# Altium PCB SV601275A.PcbDoc (part 1 of 3)
Units mil, origin at the board's own origin, x right, y up, seen from the top; angles counter-clockwise.
Board outline 1980 x 1700 mil, 6 copper layers (Top Layer, MidLayer1, MidLayer2, Mid-Layer 3, Mid-Layer 4, Bottom Layer), stack 61.3 mil thick; 82 components, 37 nets, 191 pads, 177 vias.
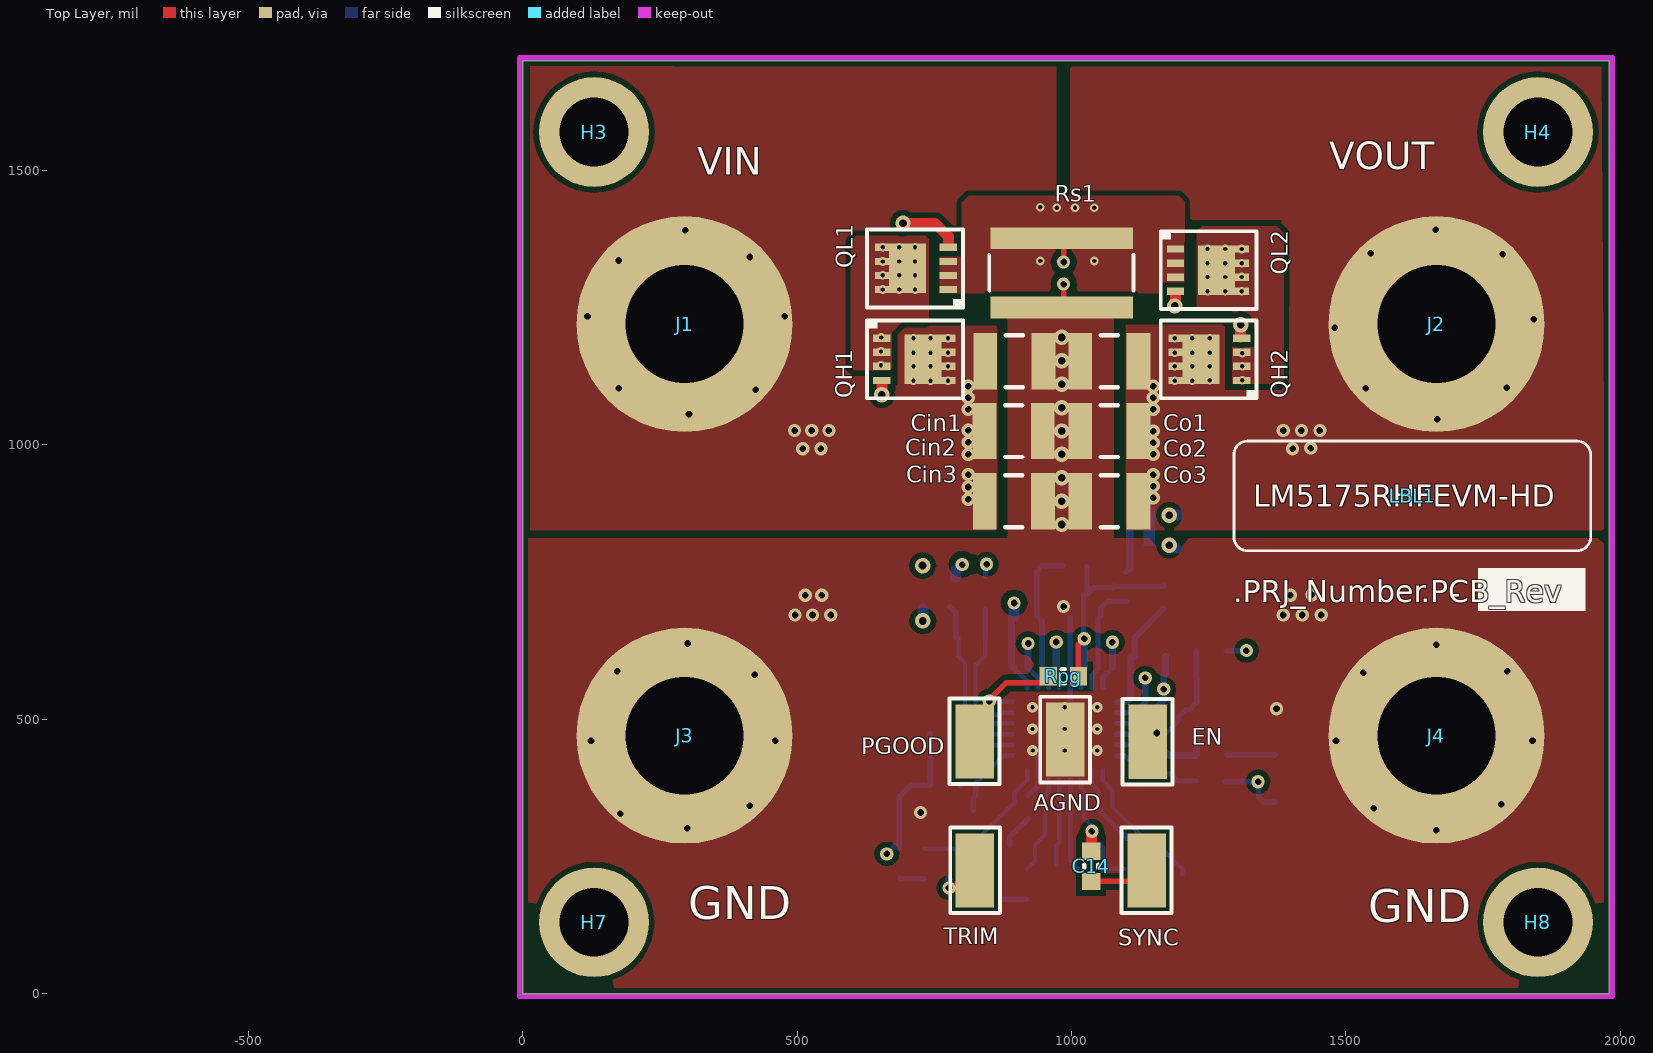
[diagram p0: Top Layer view]
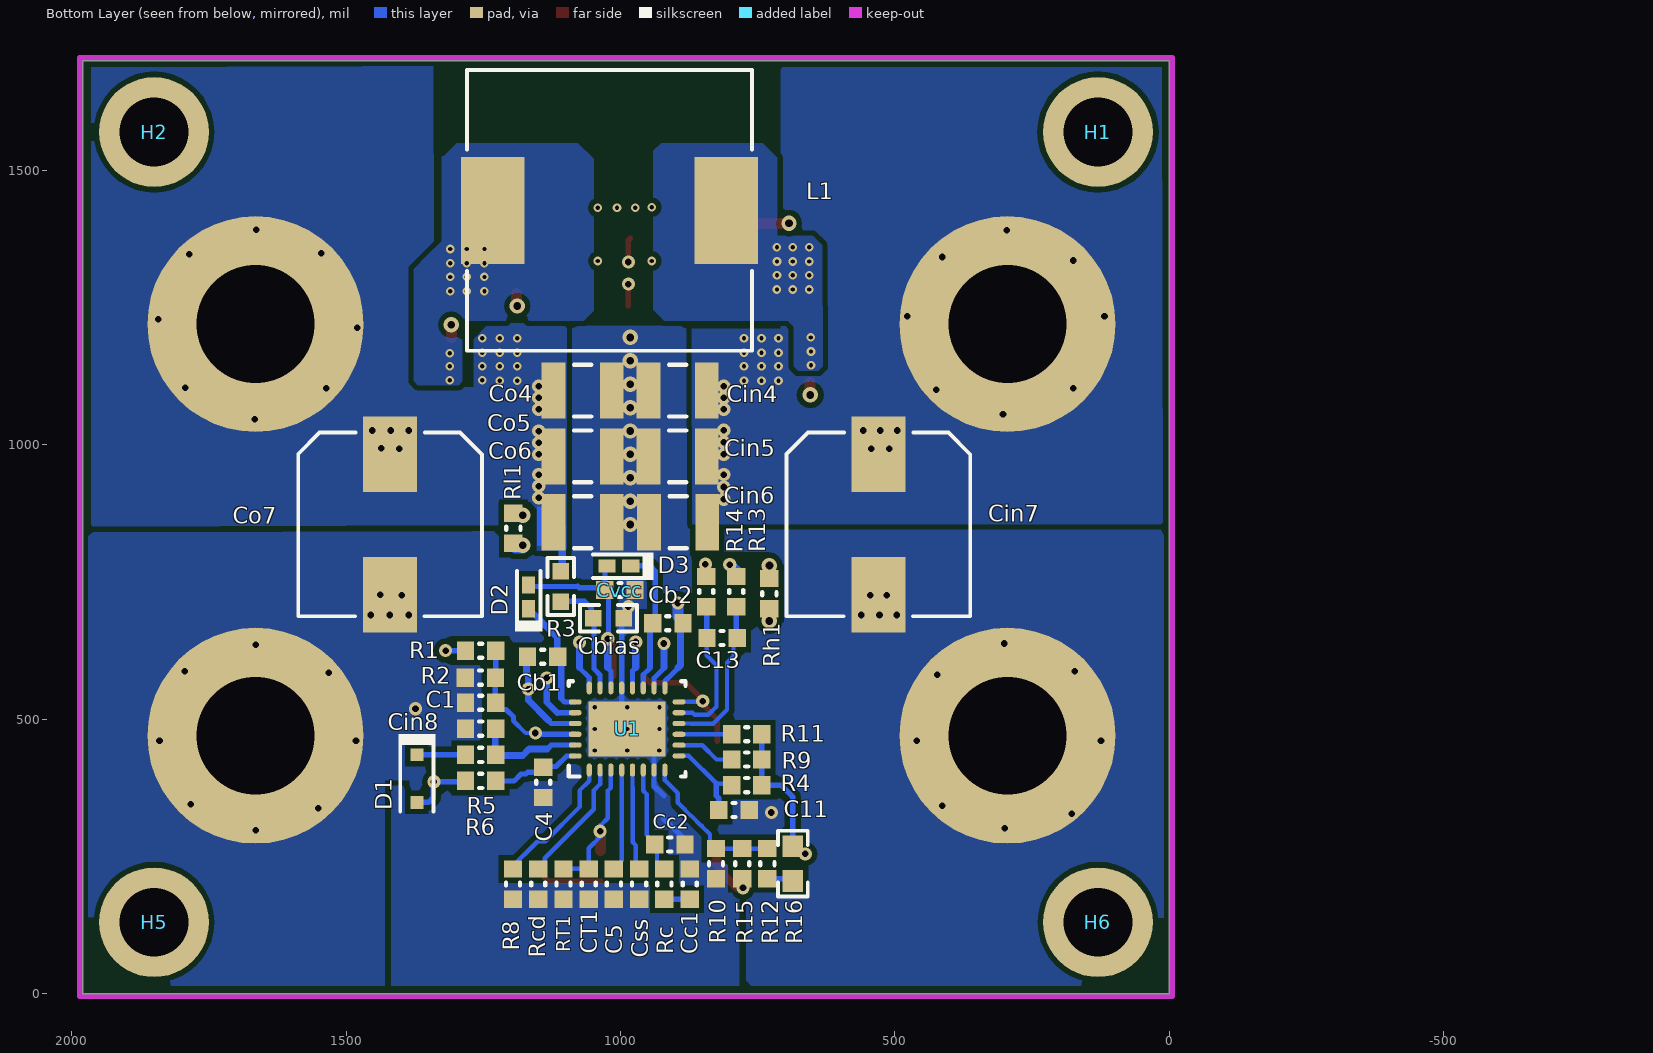
[diagram p1: Bottom Layer view, seen from below]
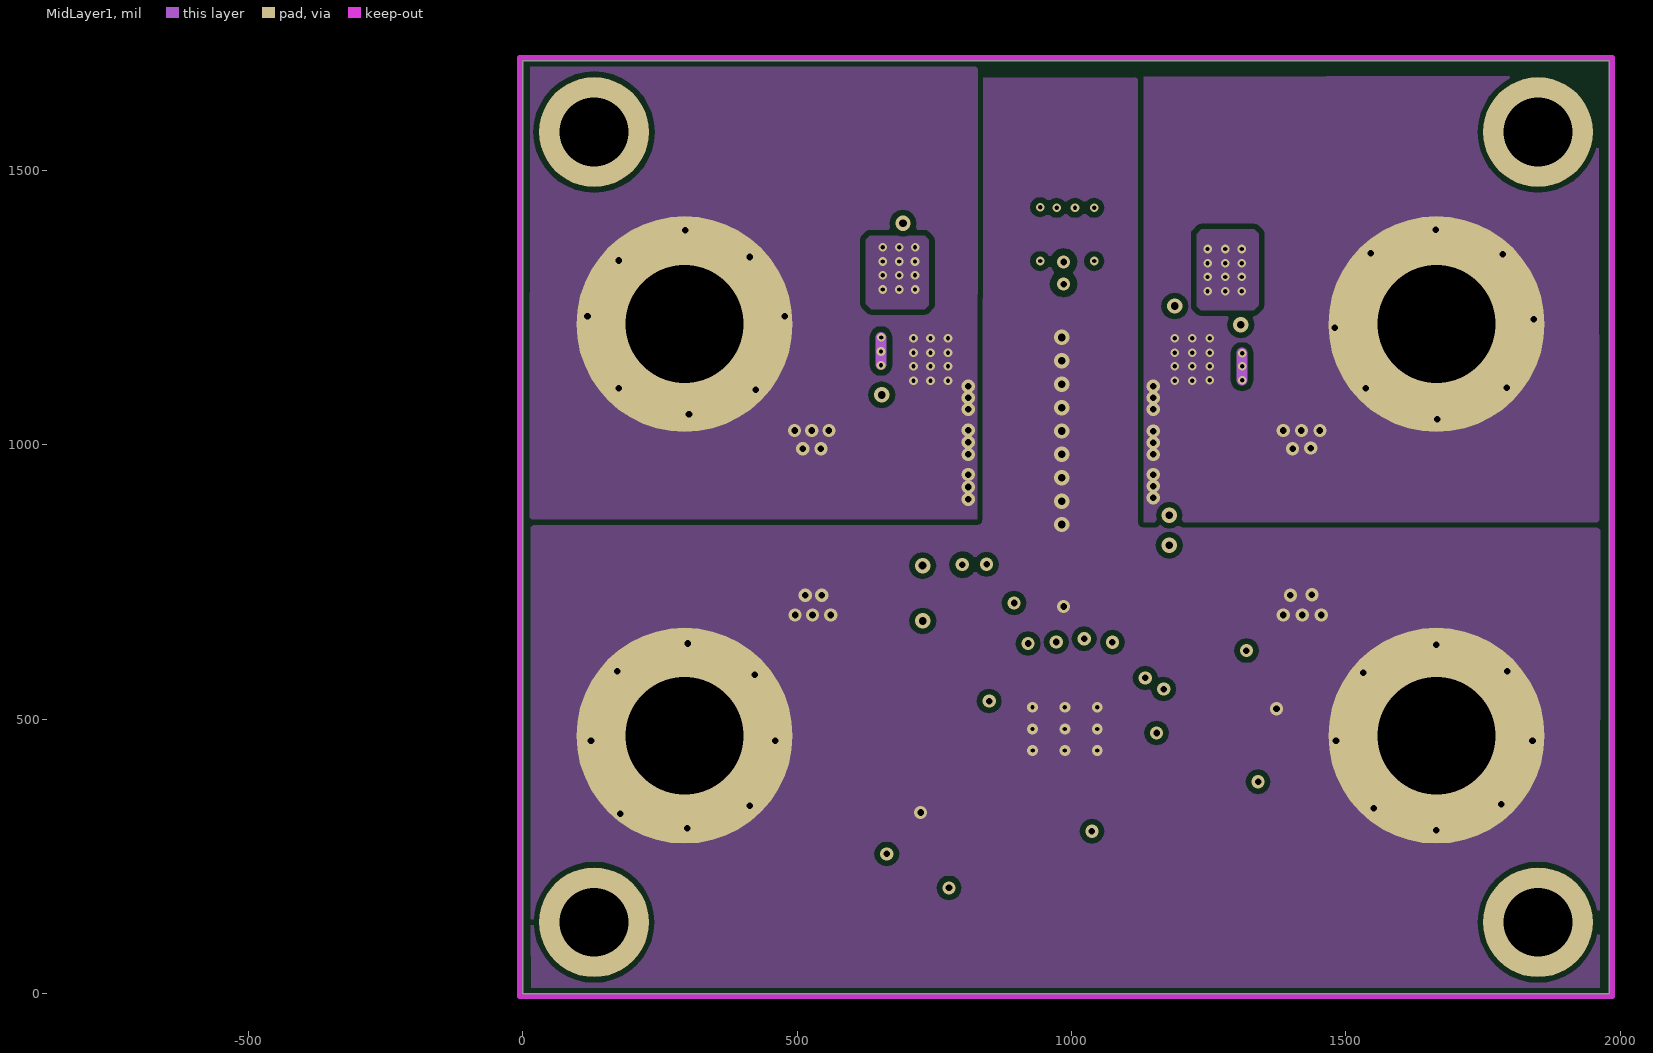
[diagram p2: MidLayer1]
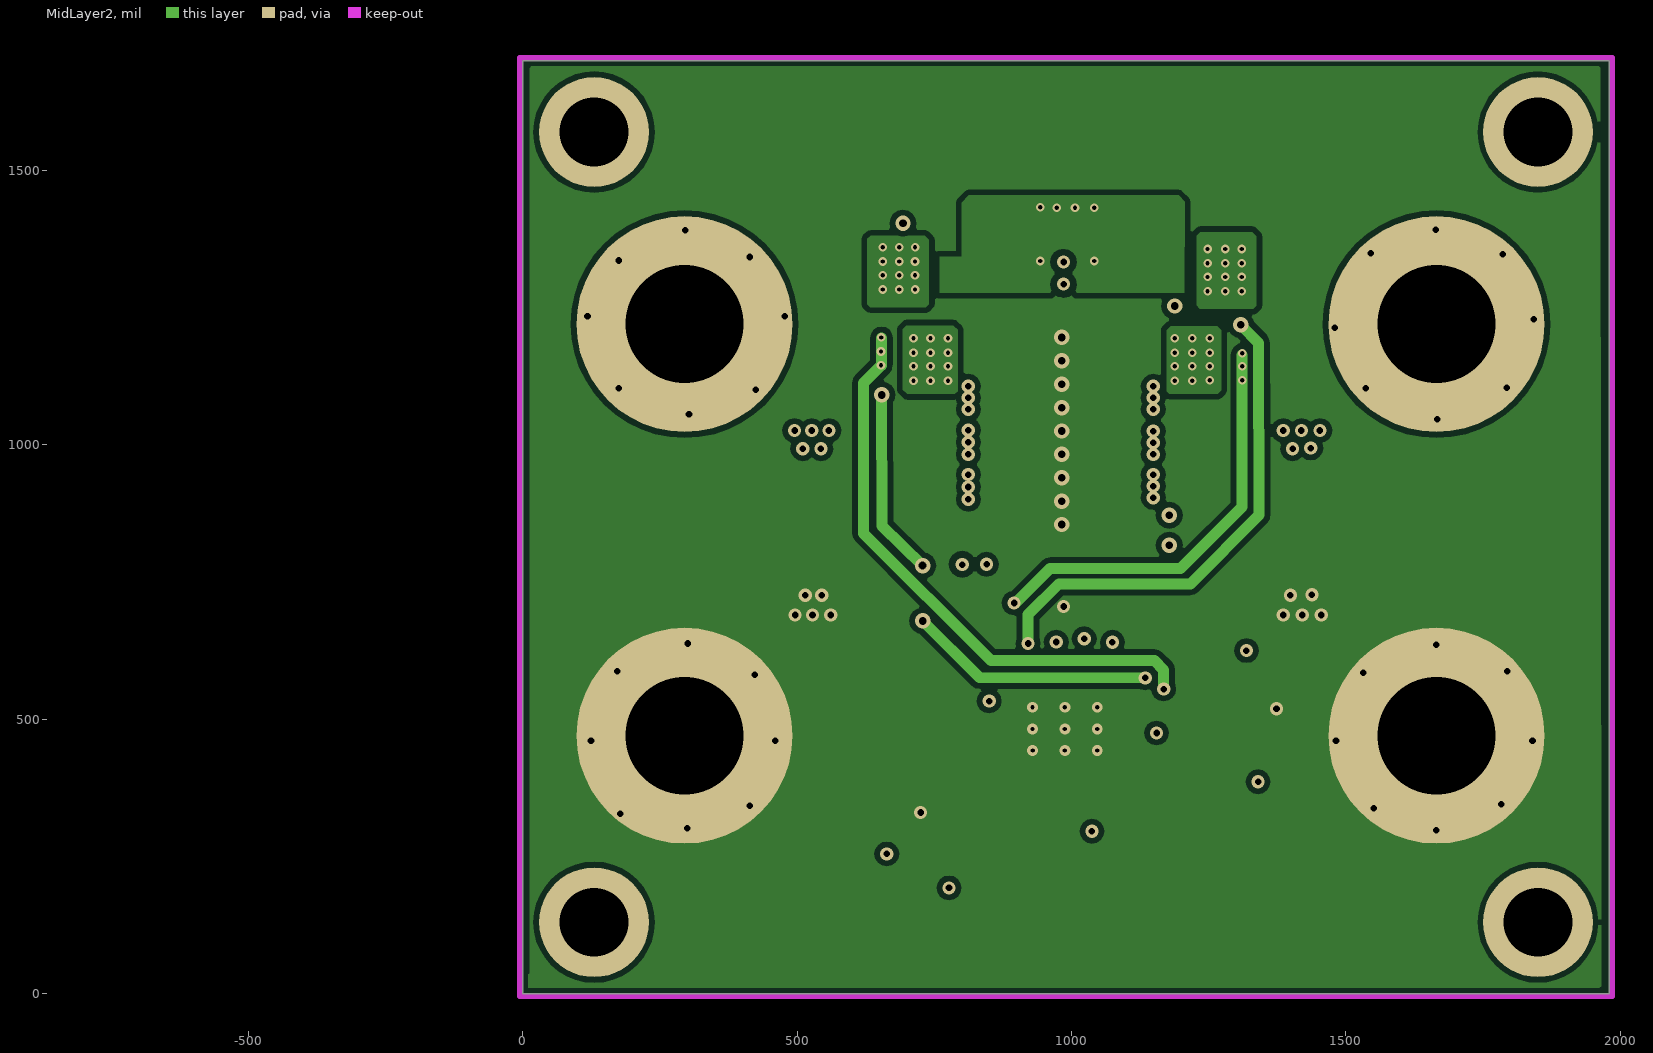
[diagram p3: MidLayer2]
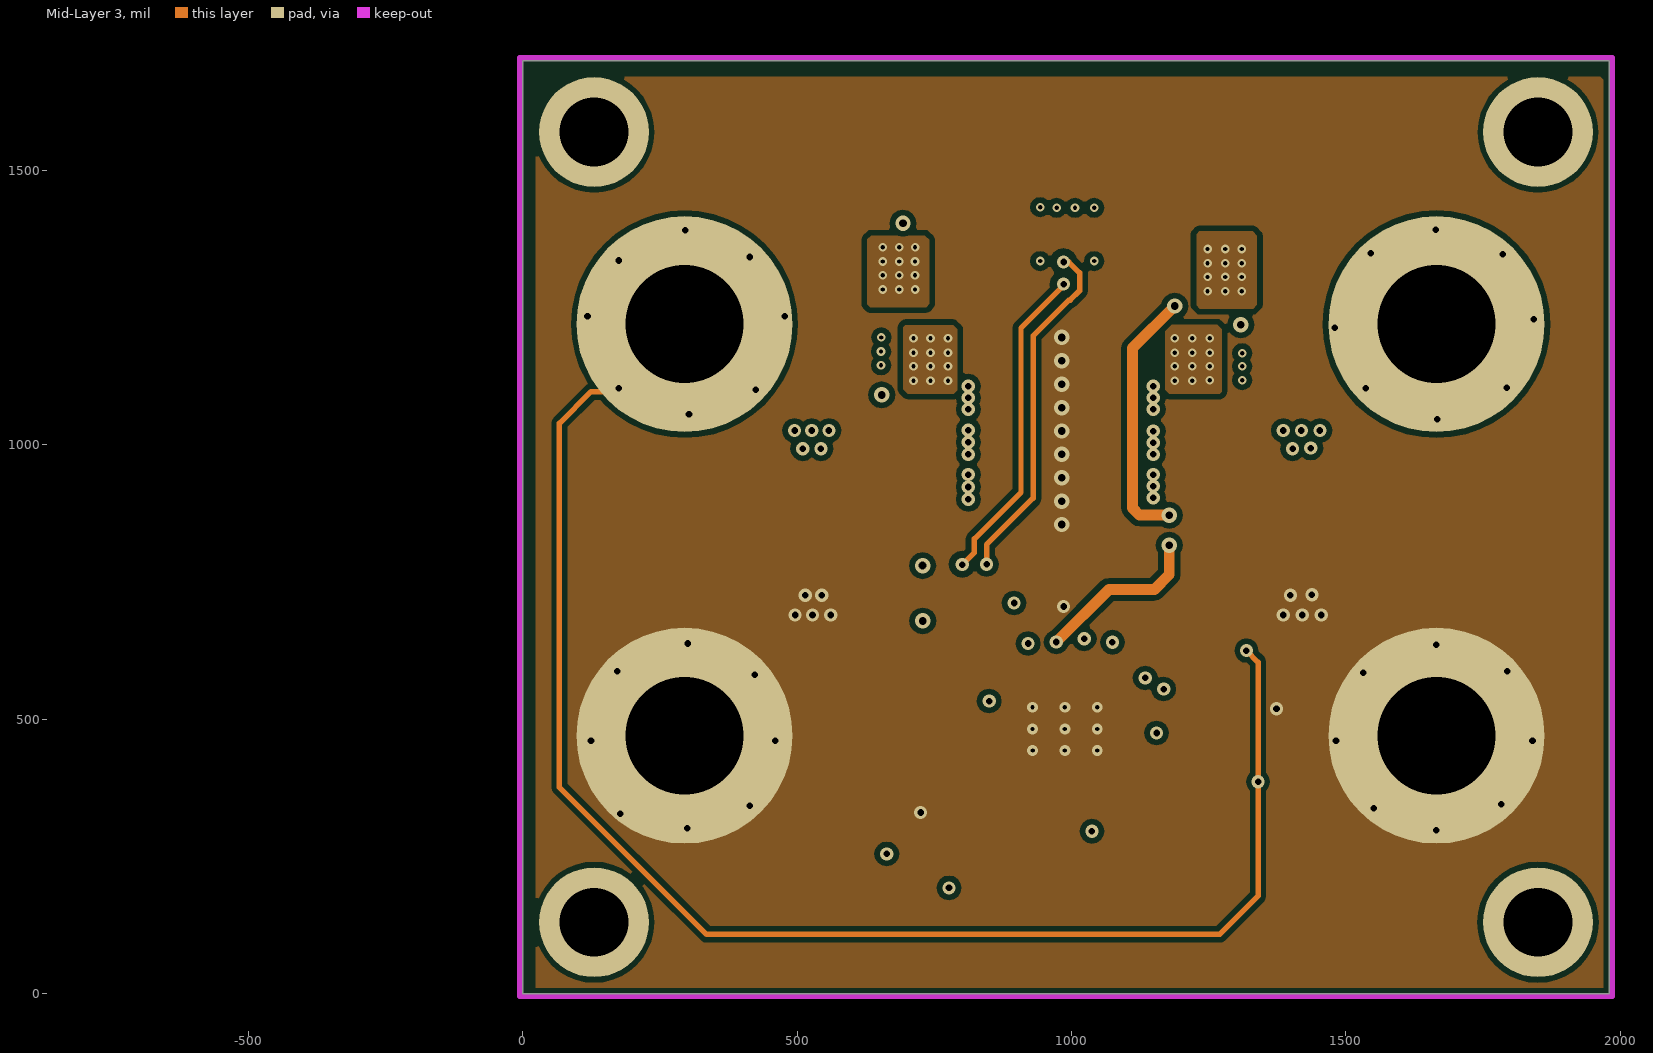
[diagram p4: Mid-Layer 3]
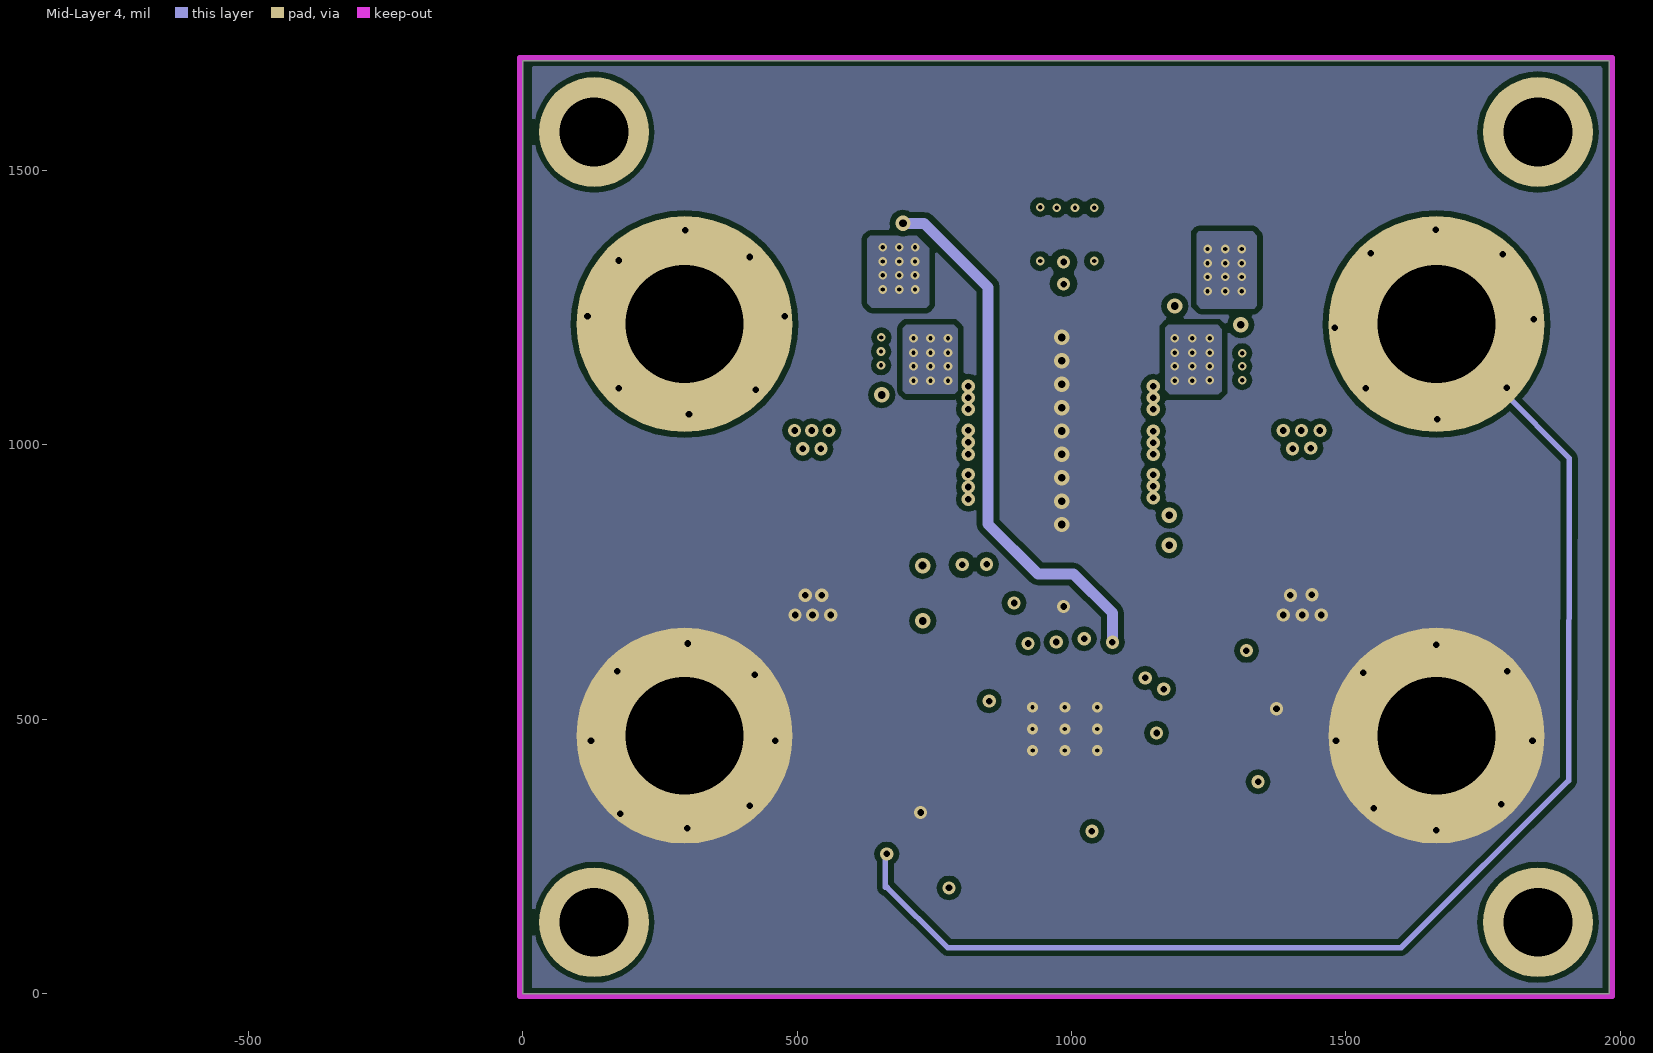
[diagram p5: Mid-Layer 4]

## Layer stack, top to bottom
Top Solder: solder mask 0.4, Solder Resist, Dk 3.5
Top Layer: signal copper 2.8
Dielectric1: core 8.9, FR-4, Dk 4.8
MidLayer1: signal copper 2.8
Dielectric2: prepreg 8.9, FR-4, Dk 4.8
MidLayer2: signal copper 2.8
Dielectric3: core 8.9, FR-4, Dk 4.8
Mid-Layer 3: signal copper 2.8
Dielectric4: prepreg 8.9, FR-4, Dk 4.8
Mid-Layer 4: signal copper 2.8
Dielectric5: core 8.9, FR-4, Dk 4.8
Bottom Layer: signal copper 2.8
Bottom Solder: solder mask 0.4, Solder Resist, Dk 3.5

## Board outline
0,0 0,1700 1980,1700 1980,0

## Design rules (kind name [scope] priority, off if disabled: settings)
AcuteAngle [All] p1: minimum=4.50000000000000E+0001 checktracksonly=FALSE
AssemblyTestPointUsage [All] p1: valid=2
Clearance Clearance_2 [InNet('NetQl1_1')] p1: gap=10 ignorepadtopadclearanceinfootprint=FALSE except(0: Arc-Hole Track-Hole SMDPad-Hole THPad-Hole Via-Hole Fill-Hole Poly-Hole Region-Hole Text-Hole)
Clearance Clearance_1 [InPolygon] p2: gap=10 ignorepadtopadclearanceinfootprint=FALSE except(0: Arc-Hole Track-Hole SMDPad-Hole THPad-Hole Via-Hole Fill-Hole Poly-Hole Region-Hole Text-Hole)
Clearance "Clearance_Polygon Board Edge" [InPolygon and OnCopper vs IsKeepout] p3: gap=25 ignorepadtopadclearanceinfootprint=FALSE except(0: Arc-Hole Track-Hole SMDPad-Hole THPad-Hole Via-Hole Fill-Hole Poly-Hole Region-Hole Text-Hole)
Clearance [All] p4: gap=8 ignorepadtopadclearanceinfootprint=FALSE except(0: Arc-Hole Track-Hole SMDPad-Hole THPad-Hole Via-Hole Fill-Hole Poly-Hole Region-Hole Text-Hole)
ComponentClearance ComponentClearance_1 [HasFootprint('SOT-23') vs HasFootprint('SOT-23')] p1: gap=5 collisioncheckmode=3 verticalgap=5 showdistances=FALSE
ComponentClearance "Output Cap Clearance" [InComponent('CO6') vs InComponent('CO7')] p2: gap=10 collisioncheckmode=3 verticalgap=0 showdistances=FALSE
ComponentClearance "MOSFET Clearance" [HasFootprint('PG-TDSON-8') vs HasFootprint('PG-TDSON-8')] p3: gap=10 collisioncheckmode=3 verticalgap=0 showdistances=FALSE
ComponentClearance ComponentClearance_Logo [InComponentClass('Logo')] p4: gap=5 collisioncheckmode=3 verticalgap=5 showdistances=FALSE
ComponentClearance ComponentClearance_ScrewToNut [(HasFootprint('NY PMS 440 0025 PH')) vs (HasFootprint('Keystone_1902C'))] p5: gap=5 collisioncheckmode=3 verticalgap=10 showdistances=FALSE
ComponentClearance ComponentClearance_MountingHoles [InComponentClass('Mounting Holes')] p6: gap=5 collisioncheckmode=3 verticalgap=100000 showdistances=FALSE
ComponentClearance ComponentClearance_SmallPassives [HasFootprint('0201*') or HasFootprint('0402*') or HasFootprint('0508') or HasFootprint('0603*') or HasFootprint('0612') or HasFootprint('0805*') or HasFootprint('0815*') or HasFootprint('0830*') or HasFootprint('1206*') or HasFootprint('1210*') or HasFootprint('1808*') or HasFootprint('1812*') or HasFootprint('1825*') or HasFootprint('2010*') or HasFootprint('2220*') or HasFootprint('2225*') or HasFootprint('2512*') or HasFootprint('2728*') or HasFootprint('3518*') vs HasFootprint('0201*') or HasFootprint('0402*') or HasFootprint('0508') or HasFootprint('0603*') or HasFootprint('0612') or HasFootprint('0805*') or HasFootprint('0815*') or HasFootprint('0830*') or HasFootprint('1206*') or HasFootprint('1210*') or HasFootprint('1808*') or HasFootprint('1812*') or HasFootprint('1825*') or HasFootprint('2010*') or HasFootprint('2220*') or HasFootprint('2225*') or HasFootprint('2512*') or HasFootprint('2728*') or HasFootprint('3518*')] p7: gap=8 collisioncheckmode=3 verticalgap=2 showdistances=FALSE
ComponentClearance ComponentClearance_THtoSMT [IsThruComponent vs IsSMTComponent] p8: gap=10 collisioncheckmode=3 verticalgap=20 showdistances=FALSE
ComponentClearance ComponentClearance_THtoTH [IsThruComponent vs IsThruComponent] p9: gap=20 collisioncheckmode=3 verticalgap=30 showdistances=FALSE
DiffPairsRouting [All] p1: maxlimit=100 minlimit=10 mostfreqgap=10 toplayer_minwidth=15 toplayer_maxwidth=15 toplayer_prefwidth=15 midlayer1_minwidth=15 midlayer1_maxwidth=15 midlayer1_prefwidth=15 midlayer2_minwidth=15 midlayer2_maxwidth=15 midlayer2_prefwidth=15 midlayer3_minwidth=15 midlayer3_maxwidth=15 midlayer3_prefwidth=15 midlayer4_minwidth=15 midlayer4_maxwidth=15 midlayer4_prefwidth=15 bottomlayer_minwidth=15 bottomlayer_maxwidth=15 bottomlayer_prefwidth=15 maxuncoupledlength=1000
FabricationTestPointUsage TestPointUsage [All] p1: valid=2 allowmultiple=FALSE
FabricationTestpoint Testpoint [All] p1: side=3 testpointundercomponent=TRUE minsize=40 maxsize=100 preferedsize=60 minholesize=0 maxholesize=40 preferedholesize=32 testpointgrid=1 allowsidetop=TRUE allowsidebottom=TRUE usegrid=TRUE gridtolerance=0.01
FanoutControl Fanout_LCC [IsLCC] p1: bgadir=Out bgaviamode=Centered fanoutstyle=Auto fanoutdirection=Alternating viagrid=1 // Fanout_LCC (Default Rule)
FanoutControl Fanout_BGA [IsBGA] p2: bgadir=Out bgaviamode=Centered fanoutstyle=Auto fanoutdirection=Alternating viagrid=1 // Fanout_BGA (Default Rule)
FanoutControl Fanout_Default [All] p4: bgadir=Out bgaviamode=Centered fanoutstyle=Auto fanoutdirection=Alternating viagrid=1 // Fanout_Default (Default Rule)
FanoutControl Fanout_Small [(CompPinCount < 5)] p5: bgadir=Out bgaviamode=Centered fanoutstyle=Auto fanoutdirection=OutThenIn viagrid=1 // Fanout_Small (Default Rule)
HoleSize [All] p1: absolutevalues=TRUE maxlimit=280 minlimit=6 maxpercent=80.000 minpercent=20.000
HoleToHoleClearance [All] p1: gap=5 allowstackedmicrovias=TRUE
MinimumAnnularRing [All] p1: minimumring=2
MinimumSolderMaskSliver MinimumSolderMaskSliver_Logo [InComponentClass('Logo') vs InComponentClass('Logo')] p1 off: minsoldermaskwidth=0.7
MinimumSolderMaskSliver [All] p2: minsoldermaskwidth=2
PlaneClearance [All] p1: clearance=15
PlaneConnect [All] p1: planeconnectstyle=Direct reliefexpansion=10 reliefentries=4 reliefconductorwidth=10 reliefairgap=10
PolygonConnect [All] p1: connectstyle=Direct reliefconductorwidth=10 reliefentries=4 polygonreliefangle="90 Angle" airgapwidth=10
RoutingVias [All] p1: holewidth=12 width=24 viastyle="Through Hole" minholewidth=7.87 minwidth=15.75 maxholewidth=40 maxwidth=65
SMDToCorner [All] p1: distance=0
SilkToBoardRegionClearance [NOT((IsComment OR IsDesignator) AND (Hide <> 'FAIL'))AND NOT InRegion (100,500,4000,800)] p1:
SilkToSilkClearance [All vs All  AND NOT (InComponent('Logo3'))] p1: silktosilkclearance=2
SilkToSolderMaskClearance SilkscreenOverComponentPads [IsPad] p1: minsilkscreentomaskgap=1 clearancetoexposedcopper=TRUE
SolderMaskExpansion [All] p1: expansion=3 istentingtop=FALSE
Width [All] p1: maxlimit=100 minlimit=6 preferedwidth=10 checkconnectedcopper=TRUE
13 further rules are at their usual default settings.

## Classes and differential pairs
component class SV601275A: 6 AGND C1 C3 C4 C5 C11 C13 C14 Cb1 Cb2 Cbias Cc1 Cc2 Cin1 Cin2 Cin3 Cin4 Cin5 Cin6 Cin7 Cin8 CO1 CO2 CO3 CO4 CO5 CO6 Co7 Css CT1 Cvcc D1 D2 D3 EN J1 J2 J3 J4 L1 NT1 PGOOD QH1 QH2 QL1 QL2 R1 R2 R3 R4 R5 R6 R8 R9 R10 R11 R12 R13 R14 R15 R16 Rc Rcd Rh1 Rl1 Rpg Rs1 RT1 SYNC TRIM U1
component class Label: LBL1
component class AssemblyNote: ZZ1 ZZ2 ZZ3 ZZ4
component class SV601275A_HW: H1 H2 H3 H4 H5 H6 H7 H8 LBL1 ZZ1 ZZ2 ZZ3 ZZ4
component class "Mounting Holes": H3 H4 H7 H8

## Components (designator, comment, footprint, x,y, rotation, side; value= is the part's Value field where it differs from the comment)
AGND "5015" Testpoint_Keystone_Miniature 989,463 r270 top value=SMT
C1 "GRM1885C1H101JA01D" 0603L 1255,530 r180 bottom value=100pF
C4 "GRM1885C1H101JA01D" 0603L 1140.8,385.01 r90 bottom value=100pF
C5 "GRM1885C1H121JA01D" 0603L 1012,199.75 r270 bottom value=120pF
C11 "GRM1885C1H101JA01D" 0603L 793.22,334.58 r180 bottom value=100pF
C13 "GRM1885C1H470JA01D" 0603L 815,648.13 r0 bottom value=47pF
C14 "CGA3E2NP01H101J080AA" 0603L 1035.77,232 r270 top value=100pF
Cb1 "GCM188R71H104KA57D" 0603L 1142,614 r0 bottom value=0.1uF
Cb2 "GCM188R71H104KA57D" 0603L 913.61,675 r0 bottom value=0.1uF
Cbias "C1608X7R1H224K080AB" 0603_HV 1021.96,684 r180 bottom value=0.22uF
Cc1 "GRM188R71H223KA01D" 0603L 874,199.75 r90 bottom value=0.022uF
Cc2 "GRM1885C1H221JA01D" 0603L 910,271.75 r0 bottom value=220pF
Cin1 "GRM32ER71H106KA12L" 1210L 895.96,1152.37 r0 top value=10uF
Cin2 "GRM32ER71H106KA12L" 1210L 894.51,1025.14 r0 top value=10uF
Cin3 "GRM32ER71H106KA12L" 1210L 895.12,897.08 r0 top value=10uF
Cin4 "GRM32ER71H106KA12L" 1210L 895.96,1098.75 r0 bottom value=10uF
Cin5 "GRM32ER71H106KA12L" 1210L 895.96,979 r0 bottom value=10uF
Cin6 "GRM32ER71H106KA12L" 1210L 894.96,859 r0 bottom value=10uF
Cin7 "EEHZC1H680P" SM_RADIAL_8MM 530,855 r270 bottom value=68uF
Cin8 "C1608X7R1H224K080AB" 0603L 1255,483 r0 bottom value=0.22uF
Co1 "GRM32ER71H106KA12L" 1210L 1069.11,1152.37 r180 top value=10uF
Co2 "GRM32ER71H106KA12L" 1210L 1069.11,1025.14 r180 top value=10uF
Co3 "GRM32ER71H106KA12L" 1210L 1069.11,897.08 r180 top value=10uF
Co4 "GRM32ER71H106KA12L" 1210L 1068.96,1098.75 r180 bottom value=10uF
Co5 "GRM32ER71H106KA12L" 1210L 1068.96,979 r180 bottom value=10uF
Co6 "GRM32ER71H106KA12L" 1210L 1068.96,859 r180 bottom value=10uF
Co7 "EEHZC1H680P" SM_RADIAL_8MM 1420,855 r270 bottom value=68uF
Css "GRM188R71H473KA61D" 0603L 966.16,199.75 r270 bottom value=0.047uF
CT1 "DNP" 0603L 1058,199.75 r90 bottom value=100pF
Cvcc "GRM188R71C105KA12D" 0603L 1001,735.42 r180 bottom value=1uF
D1 "BAT54HT1G" sod-323 1371,392 r270 bottom value=30V
D2 "BAS516,115" SOD-523 1167.39,723 r90 bottom value=100V
D3 "BAS516,115" SOD-523 1002.9,779 r0 bottom value=100V
EN "5015" Testpoint_Keystone_Miniature 1139,459 r270 top value=SMT
H1 "1902C" Keystone_1902C#1 130,1570 r180 bottom
H2 "1902C" Keystone_1902C#1 1850,1570 r180 bottom
H3 "NY PMS 440 0025 PH" "NY PMS 440 0025 PH" 130,1570 r0 top
H4 "NY PMS 440 0025 PH" "NY PMS 440 0025 PH" 1850,1570 r0 top
H5 "1902C" Keystone_1902C#2 1850,130 r180 bottom
H6 "1902C" Keystone_1902C#2 130,130 r180 bottom
H7 "NY PMS 440 0025 PH" "NY PMS 440 0025 PH" 130,130 r0 top
H8 "NY PMS 440 0025 PH" "NY PMS 440 0025 PH" 1850,130 r0 top
J1 "575-8" Keystone575-8 295,1220 r0 top
J2 "575-8" Keystone575-8 1665,1220 r180 top
J3 "575-8" Keystone575-8 295,470 r0 top
J4 "575-8" Keystone575-8 1665,470 r180 top
L1 "IHLP5050FDER3R3M01" IHLP-5050FD 1020,1427.41 r0 bottom value=3.3uH
LBL1 "LM5175RHFEVM-HD" Label_650x200 1621,907 r0 top
PGOOD "5015" Testpoint_Keystone_Miniature 824,459.75 r270 top value=SMT
QH1 "BSZ042N06NS" PG-TSDSON-8 714.96,1155.75 r0 top
QH2 "BSZ0902NS" PG-TSDSON-8 1249.96,1155.75 r180 top value=30V
QL1 "BSZ042N06NS" PG-TSDSON-8 714.96,1321.42 r180 top
QL2 "BSZ0902NS" PG-TSDSON-8 1249.96,1318.42 r0 top value=30V
R1 "RC0603FR-07200KL" 0603L 1255,625 r0 bottom value=200k
R2 "RC0603FR-0752K3L" 0603L 1255.19,575.9 r180 bottom value=52.3k
R3 "RC0603FR-0710RL" 0603_HV 1109,742 r90 bottom value=10.0
R4 "CRCW060310R0FKEA" 0603L 770,380 r180 bottom value=10.0
R5 "RC0603FR-0710RL" 0603L 1255,435 r0 bottom value=10.0
R6 "RC0603FR-0710RL" 0603L 1255,387.63 r180 bottom value=10.0
R8 "CRCW0603200KFKEA" 0603L 1196,199.75 r90 bottom value=200k
R9 "RC0603JR-070RL" 0603L 770,426.71 r0 bottom value=0
R10 "RC0603FR-077K15L" 0603L 825.96,236.75 r270 bottom value=7.15k
R11 "RC0603JR-070RL" 0603L 770,472.52 r0 bottom value=0
R12 "RC0603FR-07100KL" 0603L 732.29,236.75 r90 bottom value=100k
R13 "RC0603FR-07100RL" 0603L 843.56,732.75 r90 bottom value=100
R14 "RC0603FR-07100RL" 0603L 789,732.75 r90 bottom value=100
R15 "RC0603FR-076K65L" 0603L 778,236.75 r90 bottom value=6.65k
R16 "CRCW060349R9FKEA" 0603 685.96,236.75 r270 bottom value=49.9
Rc "RC0603FR-073K01L" 0603L 920,199.75 r90 bottom value=3.01k
Rcd "RC0603JR-070RL" 0603L 1150,199.75 r90 bottom value=0
Rh1 "CRCW06030000Z0EA" 0603L 728.66,728.75 r90 bottom value=0
Rl1 "CRCW06030000Z0EA" 0603L 1195.16,848 r270 bottom value=0
Rpg "RC0603FR-0720KL" 0603L 985.16,578.05 r180 top value=20.0k
Rs1 "0.007" 2512_WIDE 982.03,1313.32 r90 top
RT1 "RC0603FR-0760K4L" 0603L 1104,199.75 r90 bottom value=60.4k
SYNC "5015" Testpoint_Keystone_Miniature 1137,224.75 r270 top value=SMT
TRIM "5015" Testpoint_Keystone_Miniature 824,224.75 r90 top value=SMT
U1 "LM5175RHFR" RHF0028A 988,482.37 r90 bottom
ZZ1 "This Assembly Note is for PCB labels only" AssemblyNoteLabel 264,2684 r0 top
ZZ2 "These assemblies are ESD sensitive, ESD precautions shall be observed." AssemblyNote 248,2566 r0 top
ZZ3 "These assemblies must be clean and free from flux and all contaminants. Use of no clean flux is not acceptable." AssemblyNote 254,2459 r0 top
ZZ4 "These assemblies must comply with workmanship standards IPC-A-610 Class 2., unless otherwise specified." AssemblyNote 254,2335 r0 top

## Footprints (in the part's own frame and the unit in brackets; to place one, negate y for a bottom-side part, rotate by r counter-clockwise, add the part's x,y. Pads: shape width x height; smd on the part's side, far side on the other; paste and mask are expansions set on the pad)
0603 [mm] "0603 from SM-752 data"
  rect 1x0.95 smd: 1(-0.8,0) 2(0.8,0)
  silkscreen extent -1.52,-0.69 1.52,0.69, body extent -0.87,-0.47 0.87,0.47, height 1
0603_HV [mil] "Ernesto recommended land pattern.  26 mil between pads."
  rect 30x30 smd: 1(-28,0) 2(28,0)
  silkscreen extent -52,-24 52,24, body extent -34,-19 34,19, height 39
0603L [mm] "0603 from SM-752 data"
  rect 0.8x0.85 smd: 1(-0.7,0) 2(0.7,0)
  silkscreen extent -0.07,-0.33 0.07,0.33, body extent -0.87,-0.47 0.87,0.47, height 1
1210L [mm] "1210 from SM-752 data"
  rect 1.1x2.6 smd: 1(-1.35,0) 2(1.35,0)
  silkscreen extent -0.4,-1.2 0.4,1.2, body extent -1.7,-1.35 1.7,1.35, height 1.35
2512_WIDE [mm] "Ohmite recommended land pattern"
  rect 1x6.6 smd: 1(-1.6,0) 2(1.6,0)
  silkscreen extent -0.82,-3.32 0.82,3.35, body extent -1.65,-3.25 1.65,3.25, height 0.7
AssemblyNote [mil] "Assembly Note"
AssemblyNoteLabel [mil] "Assembly Note for PCB Labels"
IHLP-5050FD [mm] "Vishay Dale recommended land pattern.  Document 34123 rev 18-Sep-09"
  rect 2.945x4.95 smd: 1(-5.407,0) 2(5.407,0)
  silkscreen extent -6.6,-6.5 6.6,6.5, body extent -6.86,-6.45 6.86,6.45, height 6.5
Keystone575-8 [mm] "Banana Jack"
  round 10 hole 5.45: 1(0,0)
  body extent -3.92,-3.94 3.95,3.94, height 2.36
Keystone_1902C#1 [mil] "Hex Standoff, 4-40 threaded, nylon"
  body extent -145,-126 146,126, height 501
Keystone_1902C#2 [mil] "Hex Standoff, 4-40 threaded, nylon"
  round 1 on Mech4: 0(0,0)
  body extent -145,-126 146,126, height 501
Label_650x200 [mil] "Thermal Transfer Label"
  round 1 on Mech13: 0(0,0)
  silkscreen extent -325,-100 325,100, body extent -325,-100 325,100, height 1
"NY PMS 440 0025 PH" [mil] "4-40 nylon screw and mounting hole"
  round 200 hole 125: ""(0,0)
  body extent -130,-130 130,130, height 106
PG-TSDSON-8 [mm] "Infineon recommended land pattern"
  rect 0.8x0.34 smd: 1(-1.538,0.975) 2(-1.538,0.325) 3(-1.538,-0.325) 4(-1.538,-0.975)
  rect 0.65x0.34 smd: 5(1.538,-0.975) 6(1.538,-0.325) 7(1.538,0.325) 8(1.538,0.975)
  rect 1.71x2.29 smd: 9(0.358,0)
  silkscreen extent -2.22,-1.8 2.22,1.8, body extent -1.7,-1.7 1.7,1.7, height 1.1
RHF0028A [mm] "QFN, 28-Leads, Body 5x4mm, Pitch 0.5mm, Thermal Pad 3.55x2.55mm"
  oval 0.6x0.24 smd: 1(-1.9,1.75) 2(-1.9,1.25) 3(-1.9,0.75) 4(-1.9,0.25) 5(-1.9,-0.25) 6(-1.9,-0.75) 7(-1.9,-1.25) 8(-1.9,-1.75) 15(1.9,-1.75) 16(1.9,-1.25) 17(1.9,-0.75) 18(1.9,-0.25) 19(1.9,0.25) 20(1.9,0.75) 21(1.9,1.25) 22(1.9,1.75)
  oval 0.24x0.6 smd: 9(-1.25,-2.4) 10(-0.75,-2.4) 11(-0.25,-2.4) 12(0.25,-2.4) 13(0.75,-2.4) 14(1.25,-2.4) 23(1.25,2.4) 24(0.75,2.4) 25(0.25,2.4) 26(-0.25,2.4) 27(-0.75,2.4) 28(-1.25,2.4)
  rect 2.55x3.55 smd paste-3.55: 29(0,0)
  silkscreen extent -2.2,-2.7 2.2,2.7, body extent -2.07,-2.57 2.07,2.57, height 1.01
SM_RADIAL_8MM [mm] "Nichicon 8x10"
  rect 3.5x2.5 smd: 1(-3.25,0) 2(3.25,0)
  silkscreen extent -4.25,-4.25 4.25,4.25, body extent -4.25,-4.25 4.25,4.25, height 10.5
sod-323 [mm] "NXP recommended land pattern"
  rect 0.6x0.6 smd paste-0.05: 1(-1.1,0) 2(1.1,0)
  silkscreen extent -2.06,-0.86 1.53,0.86, body extent -1.3,-0.67 1.3,0.68, height 1.1
SOD-523 [mm] "NXP Semiconductor recommended land pattern, nominal STEP model"
  rect 0.8x0.6 smd paste-0.05: 1(-0.55,0) 2(0.55,0)
  silkscreen extent -1.6,-0.63 1.2,0.64, body extent -0.8,-0.4 0.8,0.4, height 0.72
Testpoint_Keystone_Miniature [mil] "Miniature SMT test point"
  rect 135x70 smd: 1(0,0)
  silkscreen extent -78,-46 78,45, body extent -52,-20 52,20, height 61

## Part data
AGND EN PGOOD SYNC TRIM: "Test Point, Miniature, SMT", Manufacturer=Keystone, Supplier Part Number 1=5015KCT-ND, ComponentLink1Description="Datasheet Link", ComponentLink1URL=http://www.keyelco.com/userAssets/store/files/5015.PDF, CompType="Test Point Loop", LatestRevisionDate=2014-05-06, MountType=SMT, PackageReference=Testpoint_Keystone_Miniature, PartNumber=5015, Publisher="Texas Instruments", RoHS=Y, Supplier 1=Digi-Key, SymbolVersion=2008-07-10, U/M=EA
C1 C4 C11: "CAP, CERM, 100pF, 50V, +/-5%, C0G/NP0, 0603", Cap_Case=0603, Manufacturer=MuRata, Supplier Part Number 1=490-1427-1-ND, TempCo=C0G/NP0, Tolerance_%=5, Value1=Unknown, Value2=50V, ValueDisplayed=100pF, Cap_F=0.0000000001, ComponentLink1Description="Datasheet link", ComponentLink1URL=http://search.murata.co.jp/Ceramy/PnsearchViewAction.do?HnOFG=ON&HnNFG=ON&SEL_CNT=50&sLang=en&sKey=GRM1885C1H101JA01D&x=9&y=9&search=startwith, CompType=Capacitor, MountType=SMT, PackageReference=0603, PartNumber=GRM1885C1H101JA01D, Polarized=N, Published=2008-06-19, Publisher="Texas Instruments", RoHS=Y, Supplier 1=Digi-Key, Supplier 2=Mouser, Supplier 3=Farnell, Supplier Part Number 2=81-GRM39C101J50, Supplier Part Number 3=8819866, SymbolVersion=2008-07-09, TaMax_C=125, TaMin_C=-55, Technology=Ceramic, U/M=EA, VDC_V=50
  C1 C4: LatestRevisionDate=2013-08-08
  C11: LatestRevisionDate=2014-05-15
C5: "CAP, CERM, 120pF, 50V, +/-5%, C0G/NP0, 0603", Cap_Case=0603, Manufacturer=MuRata, Supplier Part Number 1=490-1429-1-ND, TempCo=C0G/NP0, Tolerance_%=5, Value1=Unknown, Value2=50V, ValueDisplayed=120pF, Cap_F=0.00000000012, ComponentLink1Description="Datasheet link", ComponentLink1URL=http://search.murata.co.jp/Ceramy/PnsearchViewAction.do?HnOFG=ON&HnNFG=ON&SEL_CNT=50&sLang=en&sKey=GRM1885C1H121JA01D&x=9&y=9&search=startwith, CompType=Capacitor, LatestRevisionDate=2014-05-15, MountType=SMT, PackageReference=0603, PartNumber=GRM1885C1H121JA01D, Polarized=N, Published=2008-06-19, Publisher="Texas Instruments", RoHS=Y, Supplier 1=Digi-Key, Supplier 2=Mouser, Supplier 3=Farnell, Supplier Part Number 2=81-GRM39C121J50, Supplier Part Number 3=1403555, SymbolVersion=2008-07-09, TaMax_C=125, TaMin_C=-55, Technology=Ceramic, U/M=EA, VDC_V=50
C13: "CAP, CERM, 47pF, 50V, +/-5%, C0G/NP0, 0603", Cap_Case=0603, Manufacturer=MuRata, Supplier Part Number 1=490-1419-1-ND, TempCo=C0G/NP0, Tolerance_%=5, Value1=Unknown, Value2=50V, ValueDisplayed=47pF, Cap_F=0.000000000047, ComponentLink1Description="Datasheet link", ComponentLink1URL=http://search.murata.co.jp/Ceramy/PnsearchViewAction.do?HnOFG=ON&HnNFG=ON&SEL_CNT=50&sLang=en&sKey=GRM1885C1H470JA01D&x=9&y=9&search=startwith, CompType=Capacitor, LatestRevisionDate=2014-05-15, MountType=SMT, PackageReference=0603, PartNumber=GRM1885C1H470JA01D, Polarized=N, Published=2008-06-19, Publisher="Texas Instruments", RoHS=Y, Supplier 1=Digi-Key, Supplier 2=Mouser, Supplier 3=Farnell, Supplier Part Number 2=81-GRM39C470J50, Supplier Part Number 3=8819840, SymbolVersion=2008-07-09, TaMax_C=125, TaMin_C=-55, Technology=Ceramic, U/M=EA, VDC_V=50
C14: "CAP, CERM, 100pF, 50V, +/-5%, C0G/NP0, 0603", Cap_Case=0603, Manufacturer=TDK, Supplier Part Number 1=445-12386-1-ND, TempCo=C0G/NP0, Tolerance_%=5, Value1=Unknown, Value2=50V, ValueDisplayed=100pF, Cap_F=0.0000000001, ComponentLink1Description="Datasheet link", ComponentLink1URL=http://www.tdk.com/pdf/mlcc_prod_guide/MLCC%20Product%20Guide%20A13.pdf, CompType=Capacitor, LatestRevisionDate=2014-05-15, MountType=SMT, PackageReference=0603, PartNumber=CGA3E2NP01H101J080AA, Polarized=N, Published=2008-06-19, Publisher="Texas Instruments", RoHS=Y, Supplier 1=Digi-Key, SymbolVersion=2008-07-09, TaMax_C=150, TaMin_C=-55, Technology=Ceramic, U/M=EA, VDC_V=50
Cb1 Cb2: "CAP, CERM, 0.1uF, 50V, +/-10%, X7R, 0603", Cap_Case=0603, Manufacturer=MuRata, Supplier Part Number 1=490-4779-1-ND, TempCo=X7R, Tolerance_%=10, Value1="0.02 ohm", Value2=50V, ValueDisplayed=0.1µF, Cap_F=0.0000001, ComponentLink1Description="Datasheet link", ComponentLink1URL=http://psearch.murata.com/capacitor/product/GCM188R71H104KA57%23.pdf, CompType=Capacitor, ESR_ohm=0.02, IRMS_A=1.84, LatestRevisionDate=2014-05-15, MountType=SMT, PackageReference=0603, PartNumber=GCM188R71H104KA57D, Polarized=N, Published=2008-06-19, Publisher="Texas Instruments", RoHS=Y, Supplier 1=Digi-Key, Supplier 2=Mouser, Supplier Part Number 2=81-GCM188R71H104KA7D, SymbolVersion=2008-07-09, TaMax_C=125, TaMin_C=-55, Technology=Ceramic, U/M=EA, VDC_V=50
Cbias Cin8: "CAP, CERM, 0.22uF, 50V, +/-10%, X7R, 0603", Cap_Case=0603, Manufacturer=TDK, Supplier Part Number 1=445-7408-1-ND, TempCo=X7R, Tolerance_%=10, Value1=Unknown, Value2=50V, ValueDisplayed=0.22µF, Cap_F=0.00000022, ComponentLink1Description="Datasheet link", ComponentLink1URL=http://product.tdk.com/capacitor/mlcc/en/documents/mlcc_commercial_general_en.pdf, CompType=Capacitor, MountType=SMT, PackageReference=0603, PartNumber=C1608X7R1H224K080AB, Polarized=N, Published=2008-06-19, Publisher="Texas Instruments", RoHS=Y, Supplier 1=Digi-Key, Supplier 2=Mouser, Supplier 3=Farnell, Supplier Part Number 2=810-C1608X7R1H224K, Supplier Part Number 3=2346906, SymbolVersion=2008-07-09, TaMax_C=125, TaMin_C=-55, Technology=Ceramic, U/M=EA, VDC_V=50
  Cbias: LatestRevisionDate=2014-05-07
  Cin8: LatestRevisionDate=2014-05-28
Cc1: "CAP, CERM, 0.022 µF, 50 V, +/- 10%, X7R, 0603", Cap_Case=0603, Manufacturer=MuRata, Supplier Part Number 1=490-1517-1-ND, TempCo=X7R, Tolerance_%=10, Value1=Unknown, Value2=50V, ValueDisplayed=0.022µF, Cap_F=0.000000022, ComponentLink1Description="Datasheet link", ComponentLink1URL=http://search.murata.co.jp/Ceramy/PnsearchViewAction.do?HnOFG=ON&HnNFG=ON&SEL_CNT=50&sLang=en&sKey=GRM188R71H223KA01D&x=9&y=9&search=startwith, CompType=Capacitor, LatestRevisionDate=2014-08-06, MountType=SMT, PackageReference=0603, PartNumber=GRM188R71H223KA01D, Polarized=N, Published=2008-06-19, Publisher="Texas Instruments", RoHS=Y, Supplier 1=Digi-Key, Supplier 2=Mouser, Supplier 3=Farnell, Supplier Part Number 2=81-GRM39X223K50D, Supplier Part Number 3=8819998, SymbolVersion=2008-07-09, TaMax_C=125, TaMin_C=-55, Technology=Ceramic, U/M=EA, VDC_V=50
Cc2: "CAP, CERM, 220 pF, 50 V, +/- 5%, C0G/NP0, 0603", Cap_Case=0603, Manufacturer=MuRata, Supplier Part Number 1=490-1435-1-ND, TempCo=C0G/NP0, Tolerance_%=5, Value1=Unknown, Value2=50V, ValueDisplayed=220pF, Cap_F=0.00000000022, ComponentLink1Description="Datasheet link", ComponentLink1URL=http://search.murata.co.jp/Ceramy/PnsearchViewAction.do?HnOFG=ON&HnNFG=ON&SEL_CNT=50&sLang=en&sKey=GRM1885C1H221JA01D&x=9&y=9&search=startwith, CompType=Capacitor, LatestRevisionDate=2014-08-13, MountType=SMT, PackageReference=0603, PartNumber=GRM1885C1H221JA01D, Polarized=N, Published=2008-06-19, Publisher="Texas Instruments", RoHS=Y, Supplier 1=Digi-Key, Supplier 2=Mouser, Supplier 3=Farnell, Supplier Part Number 2=81-GRM39C221J50, Supplier Part Number 3=8819882, SymbolVersion=2008-07-09, TaMax_C=125, TaMin_C=-55, Technology=Ceramic, U/M=EA, VDC_V=50
Cin1 Cin2 Cin3 Cin4 Cin5 Cin6: "CAP, CERM, 10uF, 50V, +/-10%, X7R, 1210", Cap_Case=1210, Manufacturer=MuRata, Supplier Part Number 1=490-6544-1-ND, TempCo=X7R, Tolerance_%=10, Value1=Unknown, Value2=50V, ValueDisplayed=10µF, Cap_F=0.00001, ComponentLink1Description="Datasheet link", ComponentLink1URL=http://www.murata.com/products/catalog/pdf/c02e.pdf, CompType=Capacitor, LatestRevisionDate=2014-05-07, MountType=SMT, PackageReference=1210, PartNumber=GRM32ER71H106KA12L, Polarized=N, Published=2008-06-19, Publisher="Texas Instruments", RoHS=Y, Supplier 1=Digi-Key, Supplier 2=Mouser, Supplier Part Number 2=81-GRM32ER71H106KA2L, SymbolVersion=2008-07-09, TaMax_C=125, TaMin_C=-55, Technology=Ceramic, U/M=EA, VDC_V=50
Cin7 Co7: "CAP, AL, 68 µF, 50 V, +/- 20%, 30 ohm, SMD", Manufacturer=Panasonic, Supplier Part Number 1=P15465CT-ND, Tolerance_%=20, Value1="30 ohm", Value2=50V, ValueDisplayed=68µF, Cap_F=0.000068, ComponentLink1Description="Datasheet link", ComponentLink1URL=http://industrial.panasonic.com/www-data/pdf/ABA0000/ABA0000CE138.pdf, CompType=Capacitor, ESR_ohm=30, IRMS_A=1.25, LatestRevisionDate=2014-07-31, MountType=SMT, PackageReference=8x10, PartNumber=EEHZC1H680P, Polarized=Y, Publisher="Texas Instruments", RoHS=Y, Series=ZC, Supplier 1=Digi-Key, SymbolVersion=2008-07-09, TaMax_C=125, TaMin_C=-55, Technology=AL, U/M=EA, VDC_V=50
Co1 Co2 Co3 Co4 Co5 Co6: "CAP, CERM, 10 µF, 50 V, +/- 10%, X7R, 1210", Cap_Case=1210, Manufacturer=MuRata, Supplier Part Number 1=490-6544-1-ND, TempCo=X7R, Tolerance_%=10, Value1=Unknown, Value2=50V, ValueDisplayed=10µF, Cap_F=0.00001, ComponentLink1Description="Datasheet link", ComponentLink1URL=http://www.murata.com/products/catalog/pdf/c02e.pdf, CompType=Capacitor, LatestRevisionDate=2014-08-06, MountType=SMT, PackageReference=1210, PartNumber=GRM32ER71H106KA12L, Polarized=N, Published=2008-06-19, Publisher="Texas Instruments", RoHS=Y, Supplier 1=Digi-Key, Supplier 2=Mouser, Supplier Part Number 2=81-GRM32ER71H106KA2L, SymbolVersion=2008-07-09, TaMax_C=125, TaMin_C=-55, Technology=Ceramic, U/M=EA, VDC_V=50
Css: "CAP, CERM, 0.047 µF, 50 V, +/- 10%, X7R, 0603", Cap_Case=0603, Manufacturer=MuRata, Supplier Part Number 1=490-3287-1-ND, TempCo=X7R, Tolerance_%=10, Value1=Unknown, Value2=50V, ValueDisplayed=0.047µF, Cap_F=0.000000047, ComponentLink1Description="Datasheet link", ComponentLink1URL=http://search.murata.co.jp/Ceramy/PnsearchViewAction.do?HnOFG=ON&HnNFG=ON&SEL_CNT=50&sLang=en&sKey=GRM188R71H473KA61D&x=9&y=9&search=startwith, CompType=Capacitor, LatestRevisionDate=2014-08-13, MountType=SMT, PackageReference=0603, PartNumber=GRM188R71H473KA61D, Polarized=N, Published=2008-06-19, Publisher="Texas Instruments", RoHS=Y, Supplier 1=Digi-Key, Supplier 2=Mouser, Supplier 3=Farnell, Supplier Part Number 2=81-GRM188R71H473KA61, Supplier Part Number 3=8820015, SymbolVersion=2008-07-09, TaMax_C=125, TaMin_C=-55, Technology=Ceramic, U/M=EA, VDC_V=50
CT1: library part GRM1885C1H101JA01D, "CAP, CERM, 100pF, 50V, +/-5%, C0G/NP0, 0603", Cap_Case=0603, Manufacturer=MuRata, Supplier Part Number 1=490-1427-1-ND, TempCo=C0G/NP0, Tolerance_%=5, Value1=Unknown, Value2=50V, ValueDisplayed=100pF, Cap_F=0.0000000001, Comment_1=GRM1885C1H101JA01D, ComponentLink1Description="Datasheet link", ComponentLink1URL=http://search.murata.co.jp/Ceramy/PnsearchViewAction.do?HnOFG=ON&HnNFG=ON&SEL_CNT=50&sLang=en&sKey=GRM1885C1H101JA01D&x=9&y=9&search=startwith, CompType=Capacitor, LatestRevisionDate=2013-08-08, MountType=SMT, PackageReference=0603, PartNumber=GRM1885C1H101JA01D, Polarized=N, Published=2008-06-19, Publisher="Texas Instruments", RoHS=Y, Supplier 1=Digi-Key, Supplier 2=Mouser, Supplier 3=Farnell, Supplier Part Number 2=81-GRM39C101J50, Supplier Part Number 3=8819866, SymbolVersion=2008-07-09, TaMax_C=125, TaMin_C=-55, Technology=Ceramic, U/M=EA, VDC_V=50
Cvcc: "CAP, CERM, 1uF, 16V, +/-10%, X7R, 0603", Cap_Case=0603, Manufacturer=MuRata, Supplier Part Number 1=490-3900-1-ND, TempCo=X7R, Tolerance_%=10, Value1="0.011 ohm", Value2=16V, ValueDisplayed=1µF, Cap_F=0.000001, ComponentLink1Description="Datasheet link", ComponentLink1URL=http://search.murata.co.jp/Ceramy/PnsearchViewAction.do?HnOFG=ON&HnNFG=ON&SEL_CNT=50&sLang=en&sKey=GRM188R71C105KA12D&x=9&y=9&search=startwith, CompType=Capacitor, ESR_ohm=0.011, LatestRevisionDate=2013-07-21, MountType=SMT, PackageReference=0603, PartNumber=GRM188R71C105KA12D, Polarized=N, Published=2008-06-19, Publisher="Texas Instruments", RoHS=Y, Supplier 1=Digi-Key, Supplier 2=Mouser, Supplier 3=Farnell, Supplier Part Number 2=81-GRM188R71C105KA12, Supplier Part Number 3=1828826, SymbolVersion=2008-07-09, TaMax_C=125, TaMin_C=-55, Technology=Ceramic, U/M=EA, VDC_V=16
D1: "Diode, Schottky, 30V, 0.2A, SOD-323", Manufacturer="ON Semiconductor", Supplier Part Number 1=BAT54HT1OSCT-ND, Value1=0.2A, Value2=0.35V, ComponentLink1Description="Datasheet link", ComponentLink1URL=http://www.onsemi.com/pub/Collateral/BAT54HT1-D.PDF, CompType=Diode, Io_A=0.2, LatestRevisionDate=2014-05-07, MountType=SMT, PackageReference=SOD-323, PartNumber=BAT54HT1G, Published=2008-06-26, Publisher="Texas Instruments", Supplier 1=Digi-Key, Supplier 2=Mouser, Supplier 3=Farnell, Supplier Part Number 2=863-BAT54HT1G, Supplier Part Number 3=1459033, SymbolVersion=2008-12-08, Type=Schottky, U/M=EA, Vf_V=0.35, Vr_V=30
D2 D3: "Diode, Switching, 100V, 0.25A, SOD-523", Manufacturer="NXP Semiconductor", Supplier Part Number 1=568-1603-1-ND, Value1=0.25A, Value2=1.25V, ComponentLink1Description="Datasheet link", ComponentLink1URL=http://www.nxp.com/documents/data_sheet/BAS16_SER.pdf, CompType=Diode, Io_A=0.25, LatestRevisionDate=2014-08-29, MountType=SMT, PackageReference=SOD-523, PartNumber=BAS516,115, Published=2008-06-26, Publisher="Texas Instruments", RoHS=Y, Supplier 1=Digi-Key, Supplier 2=Mouser, Supplier 3=Farnell, Supplier Part Number 2=771-BAS516-T/R, Supplier Part Number 3=8734402, SymbolVersion=2008-12-08, TJmax_C=150, Type=Switching, U/M=EA, Vf_V=1.25, Vr_V=100
H1 H2 H5 H6: "Standoff, Hex, 0.5\"L #4-40 Nylon", Alternate Manufacturer=-, Manufacturer=Keystone, Supplier Part Number 1=1902CK-ND, Alternate PartNumber=-, ComponentLink1Description="Datasheet Link", ComponentLink1URL=http://www.keyelco.com/pdfs/M55-prod31.pdf, CompType=Hardware, LatestRevisionDate=2012-06-27, LatestRevisionNote="Initial Version", MountType=N/A, PackageReference=Standoff, PartNumber=1902C, Publisher="Texas Instruments", RoHS=Y, Supplier 1=Digi-Key
H3 H4 H7 H8: "Machine Screw, Round, #4-40 x 1/4, Nylon, Philips panhead", Alternate Manufacturer=-, DigiKeyPartNumber=H542-ND, Manufacturer="B&F Fastener Supply", Alternate PartNumber=-, ClassName="Mounting Holes", ComponentLink1Description="Datasheet Link", ComponentLink1URL=http://www.fasnetdirect.com/refguide/Machinepancombo.pdf, CompType=Hardware, LatestRevisionDate=2012-06-27, LatestRevisionNote="Initial Version", MountType=N/A, PackageReference=Screw, PartNumber="NY PMS 440 0025 PH", Publisher="Texas Instruments", RoHS=Y, Supplier 1=Digi-Key, Supplier Part Number 1=H542-ND, SymbolCreator=codlsc, SymbolVersion=2009-10-28, U/M=EA
J1 J2 J3 J4: "Standard Banana Jack, Uninsulated, 8.9mm", Manufacturer=Keystone, Supplier Part Number 1=36-575-8-ND, ComponentLink1Description="Datasheet Link", ComponentLink1URL=http://www.keyelco.com/pdfs/M55p95.pdf, CompType=Connector, LatestRevisionDate=2015-08-25, MountType=TH, PackageReference=Keystone575-8, PartNumber=575-8, Publisher="Texas Instruments", RoHS=Y, Supplier 1=Digi-Key, U/M=EA
L1: "Inductor, Shielded Drum Core, Powdered Iron, 3.3 µH, 18 A, 0.0057 ohm, SMD", Manufacturer=Vishay-Dale, Supplier Part Number 1=541-1034-1-ND, Value1="0.0057 ohm", Value2=18A, ValueDisplayed=3.3µH, AEC Category=Q200, AEC Qualified=?, ComponentLink1Description="Datasheet link", ComponentLink1URL=http://www.vishay.com/docs/34123/lp50fd01.pdf, CompType=Inductor, DCR_ohm=0.0057, Imax_A=18, Ind_H=3.3E-6, Irms="18A @ 40C rise", Isat="35A @ 20% inductance drop", LatestRevisionDate=2016-02-04, Material="Powdered Iron", MountType=SMT, PackageReference=IHLP-5050FD, PartNumber=IHLP5050FDER3R3M01, Published=2008-06-26, Publisher="Texas Instruments", RoHS=Y, Supplier 1=Digi-Key, Supplier 2=Mouser, Supplier 3=Farnell, Supplier Part Number 2=70-IHLP5050FDER3R3M1, Supplier Part Number 3=1289448, SymbolVersion=2008-07-23, Technology="Shielded Drum Core"
LBL1: library part THT-14-423-10, "Thermal Transfer Printable Labels, 0.650\" W x 0.200\" H - 10,000 per roll", Alternate Manufacturer=-, Manufacturer=Brady, Supplier Part Number 1=2065596, Alternate PartNumber=-, ClassName=Label, ComponentLink1Description="Web Page", ComponentLink1URL=http://www.bradyid.com/bradyid/pdpv/THT-14-423-10.html, CompType=Label, LatestRevisionDate=2012-07-31, LatestRevisionNote="Initial Version", MountType=N/A, Note=LM5175RHFEVM-HD, PackageReference="PCB Label 0.650\"H x 0.200\"W", PartNumber=THT-14-423-10, Publisher="Texas Instruments", RoHS=Y, Supplier 1=Farnell, Supplier 2=Newark, Supplier Part Number 2=97C5133, SymbolCreator=a0412235, SymbolVersion=2012-06-12
QH1 QL1: "MOSFET N-CH 60V 19A 8TSDSON", Alternate Manufacturer=-, Current - Continuous Drain (Id) @ 25°C="17A (Ta), 40A (Tc)", Input Capacitance (Ciss) @ Vds="2000pF @ 30V", Manufacturer="Infineon Technologies", Power - Max=2.5W, Supplier Device Package="PG-TSDSON-8 (3.3x3.3)", Supplier Part Number=BSZ042N06NSCT-ND, Alternate PartNumber=-, Category="Discrete Semiconductor Products", ComponentLink1Description="Datasheet Link", ComponentLink2Description=http://www.infineon.com/dgdl/BSZ042N06NS_Rev2.0.pdf?folderId=db3a30431ddc9372011ebafa04517f8b&fileId=db3a3043345a30bc013465d4bf1862fd, ComponentLink2URL=http://www.infineon.com/dgdl/BSZ042N06NS_Rev2.0.pdf?folderId=db3a30431ddc9372011ebafa04517f8b&fileId=db3a3043345a30bc013465d4bf1862fd, CompType="Used in some BOM reports.  Useful for finding later.", FET Feature="Logic Level Gate", FET Type="MOSFET N-Channel, Metal Oxide", Gate Charge (Qg) @ Vgs="27nC @ 10V", MountType="Surface Mount", PackageReference=8-PowerTDFN, Packaging="Cut Tape (CT)", PartNumber=BSZ042N06NS, Rds On (Max) @ Id, Vgs="4.2 mOhm @ 20A, 10V", RoHS="RoHS Compliant", Supplier=Digi-Key, Supplier 1=Digi-Key, Supplier 2=Mouser, Supplier Part Number 1=BSZ042N06NSCT-ND, Supplier Part Number 2=726-BSZ042N06NSATMA1, SymbolCreator="Use a-id", SymbolVersion="use current date i.e. 2008-05-20", U/M="EA, IN, or GM", VdsMax_V=60V, Vgs(th) (Max) @ Id="2.8V @ 36µA"
QH2 QL2: "MOSFET, N-CH, 30V, 40A, PG-TSDSON-8", Alternate Manufacturer=None, Manufacturer="Infineon Technologies", Supplier Part Number 1=BSZ0902NSCT-ND, Value1="0.0035 ohm", Value2="26 nC", ChType=N, ComponentLink1Description="Datasheet link", ComponentLink1URL=http://www.infineon.com/dgdl/BSZ0902NS_rev2.2.pdf?folderId=db3a304313b8b5a60113cee8763b02d7&fileId=db3a30432f0d175c012f25d963971d2f, CompType=MOSFET, IdsMax_A=40, LatestRevisionDate=2014-08-29, LatestRevisionNote="Added parts.", MountType=SMT, PackageReference=PG-TSDSON-8, PartNumber=BSZ0902NS, Published=2008-06-19, Publisher="Texas Instruments", QgTyp_nC=26, Rdson45_ohm=0.0035, RoHS=Y, Supplier 1=Digi-Key, Supplier 2=Mouser, Supplier Part Number 2=726-BSZ0902NS, SymbolVersion=2011-08-16, U/M=EA, VdsMax_V=30, Vgs_V=20
R1: "RES, 200k ohm, 1%, 0.1W, 0603", Manufacturer="Yageo America", Power_W=0.1, Supplier Part Number 1=311-200KHRCT-ND, TempCo="200 ppm/C", Tolerance_%=1, Value1=1%, Value2=0.1W, Value_Code=200k, ComponentLink1Description="Datasheet link", ComponentLink1URL=http://www.yageo.com/pdf/Pu-RC0603_51_PbFree_L_2.pdf, CompType=Resistor, EIA_Code=E96, LatestRevisionDate=2014-05-20, MountType=SMT, PackageReference=0603, PartNumber=RC0603FR-07200KL, Published=2008-06-26, Publisher="Texas Instruments", Res_ohm=200000, RoHS=Y, Supplier 1=Digi-Key, Supplier 2=Mouser, Supplier 3=Farnell, Supplier Part Number 2=603-RC0603FR-07200KL, Supplier Part Number 3=1799334, SymbolVersion=2009-05-29, Technology="Thick Film", U/M=EA, VDC_V=150
R2: "RES, 52.3 k, 1%, 0.1 W, 0603", Manufacturer="Yageo America", Power_W=0.1, Supplier Part Number 1=311-52.3KHRCT-ND, TempCo="200 ppm/C", Tolerance_%=1, Value1=1%, Value2=0.1W, Value_Code=52k3, ValueDisplayed=52.3k, ComponentLink1Description="Datasheet link", ComponentLink1URL=http://www.yageo.com/pdf/Pu-RC0603_51_PbFree_L_2.pdf, CompType=Resistor, EIA_Code=E96, LatestRevisionDate=2014-07-30, MountType=SMT, PackageReference=0603, PartNumber=RC0603FR-0752K3L, Published=2008-06-26, Publisher="Texas Instruments", Res_ohm=52300, RoHS=Y, Supplier 1=Digi-Key, Supplier 2=Mouser, Supplier Part Number 2=603-RC0603FR-0752K3L, SymbolVersion=2009-05-29, Technology="Thick Film", U/M=EA, VDC_V=150
R3 R5 R6: "RES, 10.0 ohm, 1%, 0.1W, 0603", Manufacturer="Yageo America", Power_W=0.1, Supplier Part Number 1=311-10.0HRCT-ND, TempCo="200 ppm/C", Tolerance_%=1, Value1=1%, Value2=0.1W, Value_Code=10R0, ComponentLink1Description="Datasheet link", ComponentLink1URL=http://www.yageo.com/pdf/Pu-RC0603_51_PbFree_L_2.pdf, CompType=Resistor, EIA_Code=E96, LatestRevisionDate=2014-05-20, MountType=SMT, PackageReference=0603, PartNumber=RC0603FR-0710RL, Published=2008-06-26, Publisher="Texas Instruments", Res_ohm=10, RoHS=Y, Supplier 1=Digi-Key, Supplier 2=Mouser, Supplier 3=Farnell, Supplier Part Number 2=603-RC0603FR-0710RL, Supplier Part Number 3=9238247, SymbolVersion=2009-05-29, Technology="Thick Film", U/M=EA, VDC_V=150
R4: "RES, 10.0, 1%, 0.1 W, 0603", Manufacturer=Vishay-Dale, Power_W=0.1, Supplier Part Number 1=541-10.0HCT-ND, TempCo="100 ppm/C", Tolerance_%=1, Value1=1%, Value2=0.1W, Value_Code=10R0, ValueDisplayed=10.0, ComponentLink1Description="Datasheet link", ComponentLink1URL=http://www.vishay.com/docs/20035/dcrcwe3.pdf, CompType=Resistor, EIA_Code=E96, LatestRevisionDate=2014-12-16, MountType=SMT, PackageReference=0603, PartNumber=CRCW060310R0FKEA, Published=2008-06-26, Publisher="Texas Instruments", Res_ohm=10, RoHS=Y, Supplier 1=Digi-Key, Supplier 2=Mouser, Supplier 3=Farnell, Supplier Part Number 2=71-CRCW0603-10-E3, Supplier Part Number 3=1469751, SymbolVersion=2009-05-29, Technology="Thick Film", U/M=EA, VDC_V=75
R8: "RES, 200 k, 1%, 0.1 W, 0603", Manufacturer=Vishay-Dale, Power_W=0.1, Supplier Part Number 1=541-200KHCT-ND, TempCo="100 ppm/C", Tolerance_%=1, Value1=1%, Value2=0.1W, Value_Code=200k, ComponentLink1Description="Datasheet link", ComponentLink1URL=http://www.vishay.com/docs/20035/dcrcwe3.pdf, CompType=Resistor, EIA_Code=E96, LatestRevisionDate=2014-08-18, MountType=SMT, PackageReference=0603, PartNumber=CRCW0603200KFKEA, Published=2008-06-26, Publisher="Texas Instruments", Res_ohm=200000, RoHS=Y, Supplier 1=Digi-Key, Supplier 2=Mouser, Supplier 3=Farnell, Supplier Part Number 2=71-CRCW0603-200K-E3, Supplier Part Number 3=1469776, SymbolVersion=2009-05-29, Technology="Thick Film", U/M=EA, ValueDisplayed=200k, VDC_V=75
R9 R11 Rcd: "RES, 0, 5%, 0.1 W, 0603", Manufacturer="Yageo America", Power_W=0.1, Supplier Part Number 1=311-0.0GRCT-ND, TempCo="200 ppm/C", Tolerance_%=5, Value1=5%, Value2=0.1W, Value_Code=0000, ValueDisplayed=0, ComponentLink1Description="Datasheet link", ComponentLink1URL=http://www.yageo.com/pdf/Pu-RC0603_51_PbFree_L_2.pdf, CompType=Resistor, EIA_Code=E24, LatestRevisionDate=2014-07-30, MountType=SMT, PackageReference=0603, PartNumber=RC0603JR-070RL, Published=2008-06-26, Publisher="Texas Instruments", Res_ohm=0, RoHS=Y, Supplier 1=Digi-Key, Supplier 2=Mouser, Supplier 3=Farnell, Supplier Part Number 2=603-RC0603JR-070RL, Supplier Part Number 3=9233130, SymbolVersion=2009-05-29, Technology="Thick Film", U/M=EA, VDC_V=50
R10: "RES, 7.15k ohm, 1%, 0.1W, 0603", Manufacturer="Yageo America", Power_W=0.1, Supplier Part Number 1=311-7.15KHRCT-ND, TempCo="200 ppm/C", Tolerance_%=1, Value1=1%, Value2=0.1W, Value_Code=7k15, ComponentLink1Description="Datasheet link", ComponentLink1URL=http://www.yageo.com/pdf/Pu-RC0603_51_PbFree_L_2.pdf, CompType=Resistor, EIA_Code=E96, LatestRevisionDate=2014-04-18, MountType=SMT, PackageReference=0603, PartNumber=RC0603FR-077K15L, Published=2008-06-26, Publisher="Texas Instruments", Res_ohm=7150, RoHS=Y, Supplier 1=Digi-Key, Supplier 2=Mouser, Supplier 3=Farnell, Supplier Part Number 2=603-RC0603FR-077K15L, Supplier Part Number 3=1799353, SymbolVersion=2009-05-29, Technology="Thick Film", U/M=EA, VDC_V=150
R12: "RES, 100k ohm, 1%, 0.1W, 0603", Manufacturer="Yageo America", Power_W=0.1, Supplier Part Number 1=311-100KHRCT-ND, TempCo="200 ppm/C", Tolerance_%=1, Value1=1%, Value2=0.1W, Value_Code=100k, ComponentLink1Description="Datasheet link", ComponentLink1URL=http://www.yageo.com/pdf/Pu-RC0603_51_PbFree_L_2.pdf, CompType=Resistor, EIA_Code=E96, LatestRevisionDate=2014-05-20, MountType=SMT, PackageReference=0603, PartNumber=RC0603FR-07100KL, Published=2008-06-26, Publisher="Texas Instruments", Res_ohm=100000, RoHS=Y, Supplier 1=Digi-Key, Supplier 2=Mouser, Supplier 3=Farnell, Supplier Part Number 2=603-RC0603FR-07100KL, Supplier Part Number 3=9238727, SymbolVersion=2009-05-29, Technology="Thick Film", U/M=EA, VDC_V=150
R13 R14: "RES, 100 ohm, 1%, 0.1W, 0603", Manufacturer="Yageo America", Power_W=0.1, Supplier Part Number 1=311-100HRCT-ND, TempCo="200 ppm/C", Tolerance_%=1, Value1=1%, Value2=0.1W, Value_Code=100R, ComponentLink1Description="Datasheet link", ComponentLink1URL=http://www.yageo.com/pdf/Pu-RC0603_51_PbFree_L_2.pdf, CompType=Resistor, EIA_Code=E96, LatestRevisionDate=2014-05-20, MountType=SMT, PackageReference=0603, PartNumber=RC0603FR-07100RL, Published=2008-06-26, Publisher="Texas Instruments", Res_ohm=100, RoHS=Y, Supplier 1=Digi-Key, Supplier 2=Mouser, Supplier 3=Farnell, Supplier Part Number 2=603-RC0603FR-07100RL, Supplier Part Number 3=9238360, SymbolVersion=2009-05-29, Technology="Thick Film", U/M=EA, VDC_V=150
R15: "RES, 6.65 k, 1%, 0.1 W, 0603", Manufacturer="Yageo America", Power_W=0.1, Supplier Part Number 1=311-6.65KHRCT-ND, TempCo="200 ppm/C", Tolerance_%=1, Value1=1%, Value2=0.1W, Value_Code=6k65, ValueDisplayed=6.65k, ComponentLink1Description="Datasheet link", ComponentLink1URL=http://www.yageo.com/pdf/Pu-RC0603_51_PbFree_L_2.pdf, CompType=Resistor, EIA_Code=E96, LatestRevisionDate=2014-07-30, MountType=SMT, PackageReference=0603, PartNumber=RC0603FR-076K65L, Published=2008-06-26, Publisher="Texas Instruments", Res_ohm=6650, RoHS=Y, Supplier 1=Digi-Key, Supplier 2=Mouser, Supplier 3=Farnell, Supplier Part Number 2=603-RC0603FR-076K65L, Supplier Part Number 3=9238581, SymbolVersion=2009-05-29, Technology="Thick Film", U/M=EA, VDC_V=150
R16: "RES, 49.9, 1%, 0.1 W, 0603", Manufacturer=Vishay-Dale, Power_W=0.1, Supplier Part Number 1=541-49.9HCT-ND, TempCo="100 ppm/C", Tolerance_%=1, Value1=1%, Value2=0.1W, Value_Code=49R9, ValueDisplayed=49.9, AEC Category=Q200, AEC Qualified=?, ComponentLink1Description="Datasheet link", ComponentLink1URL=http://www.vishay.com/docs/20035/dcrcwe3.pdf, CompType=Resistor, EIA_Code=E96, LatestRevisionDate=2016-03-05, MountType=SMT, PackageReference=0603, PartNumber=CRCW060349R9FKEA, Published=2008-06-26, Publisher="Texas Instruments", Res_ohm=49.9, RoHS=Y, Supplier 1=Digi-Key, Supplier 2=Mouser, Supplier 3=Farnell, Supplier Part Number 2=71-CRCW0603-49.9-E3, Supplier Part Number 3=1469817, SymbolVersion=2009-05-29, Technology="Thick Film", U/M=EA, VDC_V=75
Rc: "RES, 3.01k ohm, 1%, 0.1W, 0603", Manufacturer="Yageo America", Power_W=0.1, Supplier Part Number 1=311-3.01KHRCT-ND, TempCo="200 ppm/C", Tolerance_%=1, Value1=1%, Value2=0.1W, Value_Code=3k01, ComponentLink1Description="Datasheet link", ComponentLink1URL=http://www.yageo.com/pdf/Pu-RC0603_51_PbFree_L_2.pdf, CompType=Resistor, EIA_Code=E96, LatestRevisionDate=2014-05-20, MountType=SMT, PackageReference=0603, PartNumber=RC0603FR-073K01L, Published=2008-06-26, Publisher="Texas Instruments", Res_ohm=3010, RoHS=Y, Supplier 1=Digi-Key, Supplier 2=Mouser, Supplier 3=Farnell, Supplier Part Number 2=603-RC0603FR-073K01L, Supplier Part Number 3=9238549, SymbolVersion=2009-05-29, Technology="Thick Film", U/M=EA, VDC_V=150
Rh1 Rl1: "RES, 0 ohm, 5%, 0.1W, 0603", Manufacturer=Vishay-Dale, Power_W=0.1, Supplier Part Number 1=541-0.0GCT-ND, TempCo="200 ppm/C", Tolerance_%=5, Value1=5%, Value2=0.1W, Value_Code=0000, ComponentLink1Description="Datasheet link", ComponentLink1URL=http://www.vishay.com/docs/20035/dcrcwe3.pdf, CompType=Resistor, EIA_Code=E24, LatestRevisionDate=2013-07-19, MountType=SMT, PackageReference=0603, PartNumber=CRCW06030000Z0EA, Published=2008-06-26, Publisher="Texas Instruments", Res_ohm=0, RoHS=Y, Supplier 1=Digi-Key, Supplier 2=Mouser, Supplier 3=Farnell, Supplier Part Number 2=71-CRCW0603-0-E3, Supplier Part Number 3=1469739, SymbolVersion=2009-05-29, Technology="Thick Film", U/M=EA, VDC_V=75
Rpg: "RES, 20.0 k, 1%, 0.1 W, 0603", Manufacturer="Yageo America", Power_W=0.1, Supplier Part Number 1=311-20.0KHRCT-ND, TempCo="200 ppm/C", Tolerance_%=1, Value1=1%, Value2=0.1W, Value_Code=20k0, ValueDisplayed=20.0k, ComponentLink1Description="Datasheet link", ComponentLink1URL=http://www.yageo.com/pdf/Pu-RC0603_51_PbFree_L_2.pdf, CompType=Resistor, EIA_Code=E96, LatestRevisionDate=2014-07-30, MountType=SMT, PackageReference=0603, PartNumber=RC0603FR-0720KL, Published=2008-06-26, Publisher="Texas Instruments", Res_ohm=20000, RoHS=Y, Supplier 1=Digi-Key, Supplier 2=Mouser, Supplier 3=Farnell, Supplier Part Number 2=603-RC0603FR-0720KL, Supplier Part Number 3=1799331, SymbolVersion=2009-05-29, Technology="Thick Film", U/M=EA, VDC_V=150
Rs1: library part KRL6432E-M-R007-F-T1, "RES 0.007 OHM 3W 1% 2512 WIDE", Alternate Manufacturer=-, Manufacturer=Susumu, Power_W=3W, Supplier Device Package=6432, Supplier Part Number=408-1617-1-ND, TempCo=±50ppm/°C, Tolerance_%=±1%, Alternate PartNumber=-, Category=Resistors, ComponentLink1Description="Datasheet Link", ComponentLink2Description=http://www.susumu-usa.com/pdf/KRL_New_Long_Data_sheet.pdf, ComponentLink2URL=http://www.susumu-usa.com/pdf/KRL_New_Long_Data_sheet.pdf, CompType="Used in some BOM reports.  Useful for finding later.", Height="0.028\" (0.70mm)", MountType="SMT, TH, or N/A", Number of Terminations=2, PackageReference="Wide 2512 (6432 Metric), 1225", Packaging="Cut Tape (CT)", PartNumber=KRL6432E-M-R007-F-T1, RoHS="RoHS Compliant", Size / Dimension="0.122\" L x 0.248\" W (3.10mm x 6.30mm)", Supplier=Digi-Key, Supplier 1=Digi-Key, Supplier 2=Mouser, Supplier Part Number 1=408-1617-1-ND, Supplier Part Number 2=754-KRL6432EMR007FT1, SymbolCreator="Use a-id", SymbolVersion="use current date i.e. 2008-05-20", Technology="Current Sense", U/M="EA, IN, or GM"
RT1: "RES, 60.4 k, 1%, 0.1 W, 0603", Manufacturer="Yageo America", Power_W=0.1, Supplier Part Number 1=311-60.4KHRCT-ND, TempCo="200 ppm/C", Tolerance_%=1, Value1=1%, Value2=0.1W, Value_Code=60k4, ValueDisplayed=60.4k, ComponentLink1Description="Datasheet link", ComponentLink1URL=http://www.yageo.com/pdf/Pu-RC0603_51_PbFree_L_2.pdf, CompType=Resistor, EIA_Code=E96, LatestRevisionDate=2014-07-30, MountType=SMT, PackageReference=0603, PartNumber=RC0603FR-0760K4L, Published=2008-06-26, Publisher="Texas Instruments", Res_ohm=60400, RoHS=Y, Supplier 1=Digi-Key, Supplier 2=Mouser, Supplier Part Number 2=603-RC0603FR-0760K4L, SymbolVersion=2009-05-29, Technology="Thick Film", U/M=EA, VDC_V=150
U1: "42-V Wide VIN Synchronous 4-Switch Buck-Boost Controller, RHF0028A", Alternate Manufacturer="Texas Instruments", Alternate PartNumber=LM5175RHFT, ComponentLink1Description="Datasheet Link", ComponentLink1URL=https://sps06.itg.ti.com/sites/KMS/crossdivteams/altium/docs/ComponentDatasheets/LM5175_SNVSA37.pdf, CompType=IC, LatestRevisionDate=2016-01-25, Manufacturer="Texas Instruments", MountType=SMT, PackageReference=RHF0028A, PartNumber=LM5175RHFR, Publisher="Texas Instruments", SymbolCreator=Altium, SymbolVersion=2014-11-17, U/M=EA
ZZ1: library part AssemblyNoteLabel, Alternate Manufacturer=-, Alternate PartNumber=-, ClassName=AssemblyNote, CompType=AssemblyNote, LatestRevisionDate=2012-07-31, LatestRevisionNote="Initial Version", Publisher="Texas Instruments", SymbolCreator=a0412235, SymbolVersion=2012-06-14
ZZ2 ZZ3 ZZ4: library part AssemblyNote, Alternate Manufacturer=-, Alternate PartNumber=-, ClassName=AssemblyNote, CompType=AssemblyNote, LatestRevisionDate=2012-06-14, LatestRevisionNote="Initial Version", Publisher="Texas Instruments", SymbolCreator=codlsc, SymbolVersion=2010-05-18

## Via types
v1: diameter 24, hole 12, Top Layer to Bottom Layer, tented both sides, 91 vias
v2: diameter 15.75, hole 7.87, Top Layer to Bottom Layer, tented both sides, 60 vias
v3: diameter 28, hole 14, Top Layer to Bottom Layer, tented both sides, 17 vias
v4: diameter 19.68, hole 7.87, Top Layer to Bottom Layer, 8 vias
v5: diameter 19.69, hole 7.87, Top Layer to Bottom Layer, 1 vias

## Nets (pads, with @x,y where several pads share a name; then routed paths per layer and width w, separated by ;. In a path a pad name is that pad's centre, name@x,y a point inside that pad or via, vN(x,y) a via of type N, cw(c..) or ccw(c..) an arc to the next point about the centre after c; other vN are vias at no path point)
BIAS: Cbias.1 R3.1 U1.21 | length 205
  Bottom Layer w9.4: U1.21@1037.21,557.17 1037.21,580.86 1048,591.65 1048,683.07 1053.43,688.5 1053.43,702.8 1065.63,715 R3.1@1101,715
BOOT1: Cb1.1 D2.1 U1.23 | length 213
  Bottom Layer w9.4: U1.23@1082.49,531.58 1102.2,531.58 1109,538.37
  Bottom Layer w12: 1108,538.37 Cb1.1@1108,615 ; 1115.29,649.25 1115.29,615.87 Cb1.1@1116.15,615 ; 1116.15,650.11 D2.1@1167.39,701.35
BOOT2: Cb2.2 D3.1 U1.17 | length 271.6
  Bottom Layer w9.4: 946.41,593 958.47,580.94 U1.17@958.47,557.17
  Bottom Layer w10: Cb2.2@946.57,679.15 936.97,688.75 936.97,770.07 946.65,779.75 D3.1@984.3,779.75
  Bottom Layer w11: 946.57,594.57 Cb2.2@946.57,679.15
COMP: Cc2.2 Rc.2 U1.6 | length 198
  Bottom Layer w8: Rc.2@917.96,226.31 933.52,241.86 933.52,270.75 951.95,289.18 951.95,363.03 958.47,369.55 U1.6@958.47,407.56
DITH: Rcd.2 U1.2 | length 230.1
  Bottom Layer w8: U1.2@1037.21,407.56 1037.21,381.79 1048.93,370.07 1048.93,335.81 1138.1,246.64 1138.1,237.59 Rcd.2@1151.1,224.59